# EAGLE board BATT_DISP (EAGLE 9.5.2)
REV: A
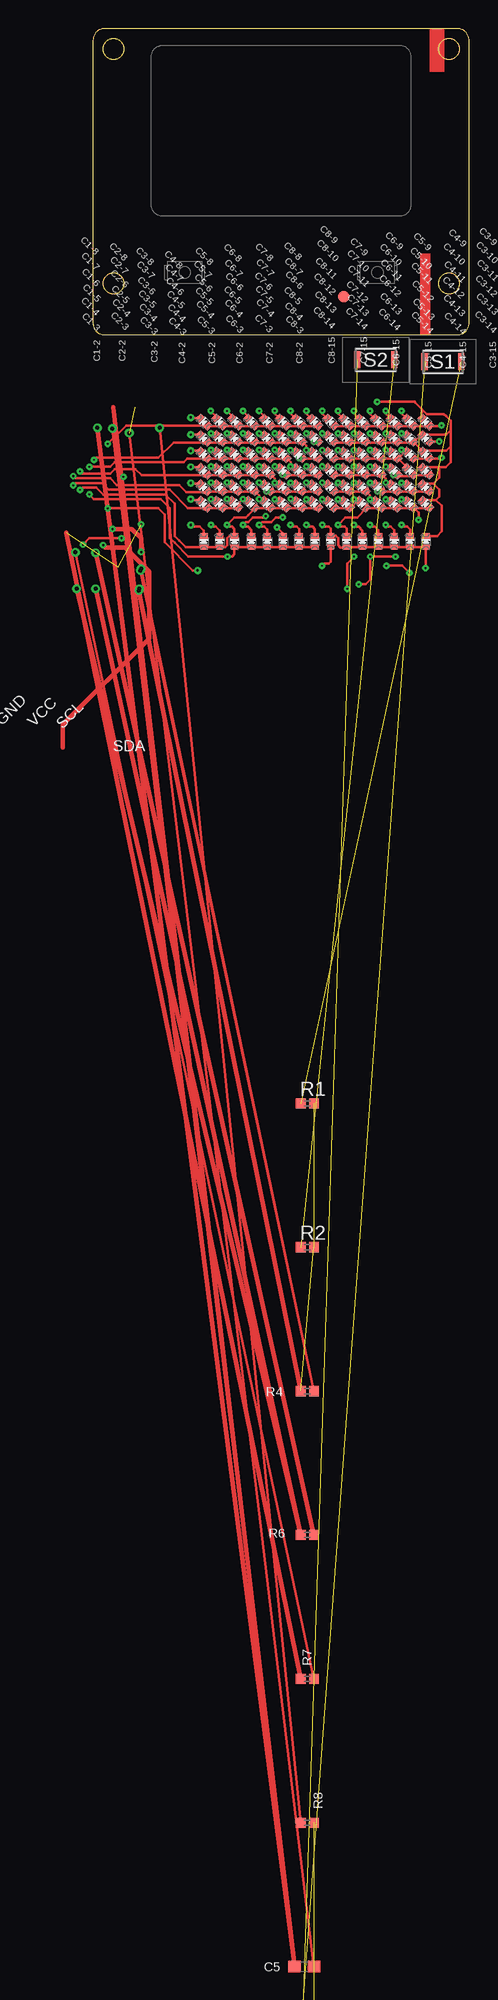
[diagram p0: board, top side]
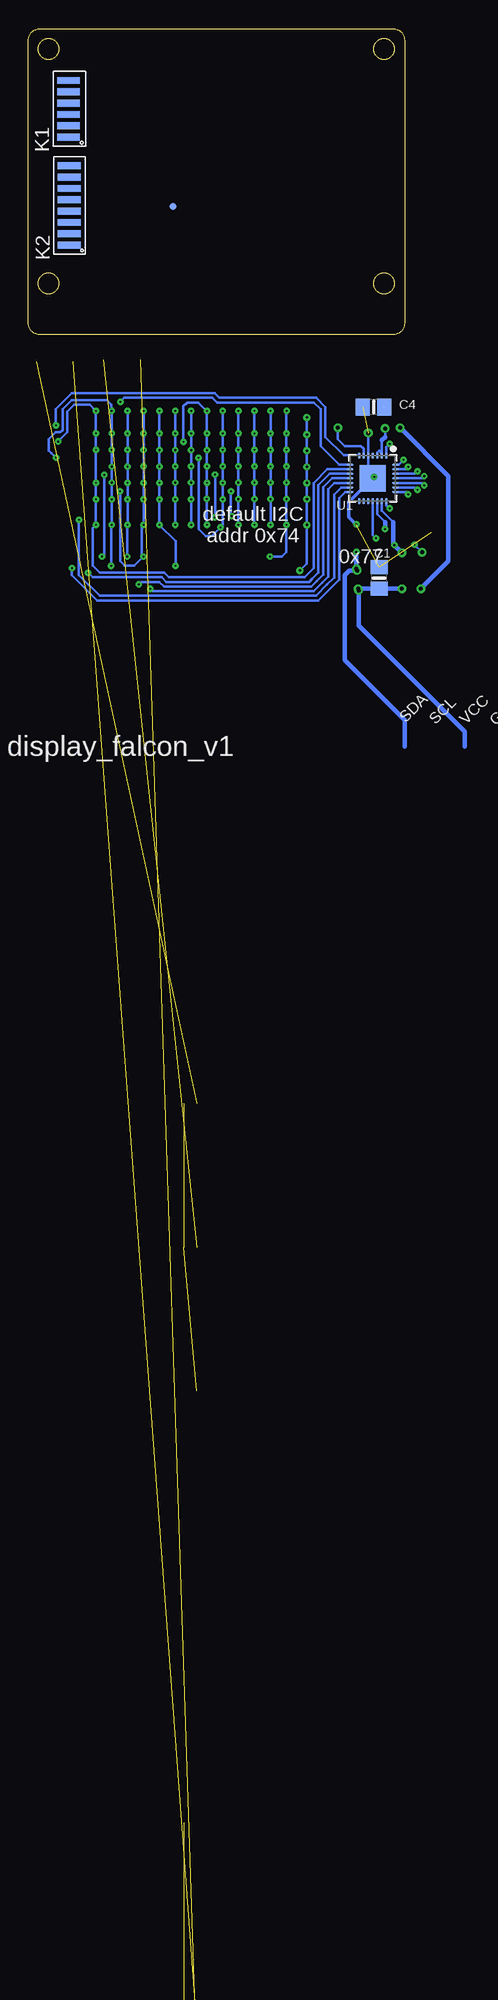
[diagram p1: board, bottom side, seen from below]

Size 33.2 x 27 mm. Coordinates in mm from the lower left corner, seen from the top.
Outline: 0,26 0,1 arc90 1,0 32.2,0 arc90 33.2,1 33.2,26 arc90 32.2,27 1,27 arc90 0,26
Outline: circle at 1.8,25.2 radius 0.9
Outline: circle at 31.4,25.2 radius 0.9
Outline: circle at 31.4,4.5 radius 0.9
Outline: circle at 1.8,4.5 radius 0.9
Copper layers (1*16): Top 0.035mm / dielectric 1.5mm / Bottom 0.035mm
Design rules "adafruit *": minimum track width 7mil, minimum drill 6mil, track to track 6mil, track to pad 6mil, pad to pad 7mil, via to via 6mil, smd to smd 5mil, copper to edge 10mil, drill to drill 8mil, minimum pad ring 10mil, minimum via ring 8mil, stop-mask expansion 2mil, vias tented up to drill 20mil, thermal gap 10mil

## Footprints (pad centres in the part's own frame; a part is rotated, then mirrored left to right if it is on the bottom)
0805-NO = smd 1.24 x 1.5: 1 -0.95,0; 2 0.95,0
CHIPLED_0402_NOOUTLINE = smd 0.65 x 0.45: A 0,-0.5; C 0,0.5
0603 = smd 1.1 x 1: 1 -0.85,0; 2 0.85,0
FIDUCIAL-MICRO = smd 0.635 x 0.635: 1 0,0
FIDUCIAL_1MM = smd 1 x 1: 1 0,0
FLEX6 = smd 0.6 x 2: 1 -2.5,0.25; 2 -1.5,0.25; 3 -0.5,0.25; 4 0.5,0.25; 5 1.5,0.25; 6 2.5,0.25
FLEX8 = smd 0.6 x 2: 1 -3.5,0.25; 2 -2.5,0.25; 3 -1.5,0.25; 4 -0.5,0.25; 5 0.5,0.25; 6 1.5,0.25; 7 2.5,0.25; 8 3.5,0.25
0402 = smd 0.85 x 0.9: 1 -0.58,0; 2 0.58,0
KXT311LHS = smd 0.55 x 1.5: 1 -1.625,0; 2 1.625,0
QFN28_4MM_0.4MM = smd 0.6 x 0.18: 1 -2,1.2; 2 -2,0.8; 3 -2,0.4; 4 -2,0; 5 -2,-0.4; 6 -2,-0.8; 7 -2,-1.2; 15 2,-1.2; 16 2,-0.8; 17 2,-0.4; 18 2,0; 19 2,0.4; 20 2,0.8; 21 2,1.2 | smd 0.18 x 0.6: 8 -1.2,-2; 9 -0.8,-2; 10 -0.4,-2; 11 0,-2; 12 0.4,-2; 13 0.8,-2; 14 1.2,-2; 22 1.2,2; 23 0.8,2; 24 0.4,2; 25 0,2; 26 -0.4,2; 27 -0.8,2; 28 -1.2,2 | smd 2.3 x 2.3: THERMAL 0,0

## Placement (x,y rotation side)
C1  10uF  [0805-NO]  2.24,-21.48 90 bottom  (outside the outline)
C1-2  [CHIPLED_0402_NOOUTLINE]  9.78,-18.26 0 top  (outside the outline)
C1-3  [CHIPLED_0402_NOOUTLINE]  9.78,-14.96 45 top  (outside the outline)
C1-4  [CHIPLED_0402_NOOUTLINE]  9.78,-13.51 45 top  (outside the outline)
C1-5  [CHIPLED_0402_NOOUTLINE]  9.78,-12.06 45 top  (outside the outline)
C1-6  [CHIPLED_0402_NOOUTLINE]  9.78,-10.61 45 top  (outside the outline)
C1-7  [CHIPLED_0402_NOOUTLINE]  9.78,-9.16 45 top  (outside the outline)
C1-8  [CHIPLED_0402_NOOUTLINE]  9.78,-7.71 45 top  (outside the outline)
C2  0.1uF  [0603]  18.64,-156.76 0 top  (outside the outline)
C2-2  [CHIPLED_0402_NOOUTLINE]  11.18,-18.26 0 top  (outside the outline)
C2-3  [CHIPLED_0402_NOOUTLINE]  11.18,-14.96 45 top  (outside the outline)
C2-4  [CHIPLED_0402_NOOUTLINE]  11.18,-13.51 45 top  (outside the outline)
C2-5  [CHIPLED_0402_NOOUTLINE]  11.18,-12.06 45 top  (outside the outline)
C2-6  [CHIPLED_0402_NOOUTLINE]  11.18,-10.61 45 top  (outside the outline)
C2-7  [CHIPLED_0402_NOOUTLINE]  11.18,-9.16 45 top  (outside the outline)
C2-8  [CHIPLED_0402_NOOUTLINE]  11.18,-7.71 45 top  (outside the outline)
C2-9  [CHIPLED_0402_NOOUTLINE]  29.38,-7.71 45 top  (outside the outline)
C2-10  [CHIPLED_0402_NOOUTLINE]  29.38,-9.16 45 top  (outside the outline)
C2-11  [CHIPLED_0402_NOOUTLINE]  29.38,-10.61 45 top  (outside the outline)
C2-12  [CHIPLED_0402_NOOUTLINE]  29.38,-12.06 45 top  (outside the outline)
C2-13  [CHIPLED_0402_NOOUTLINE]  29.38,-13.51 45 top  (outside the outline)
C2-14  [CHIPLED_0402_NOOUTLINE]  29.38,-14.96 45 top  (outside the outline)
C2-15  [CHIPLED_0402_NOOUTLINE]  29.38,-18.26 0 top  (outside the outline)
C3  0.1uF  [0603]  18.64,-169.46 0 top  (outside the outline)
C3-2  [CHIPLED_0402_NOOUTLINE]  12.48,-18.26 0 top  (outside the outline)
C3-3  [CHIPLED_0402_NOOUTLINE]  12.53,-14.96 45 top  (outside the outline)
C3-4  [CHIPLED_0402_NOOUTLINE]  12.53,-13.51 45 top  (outside the outline)
C3-5  [CHIPLED_0402_NOOUTLINE]  12.53,-12.06 45 top  (outside the outline)
C3-6  [CHIPLED_0402_NOOUTLINE]  12.53,-10.61 45 top  (outside the outline)
C3-7  [CHIPLED_0402_NOOUTLINE]  12.53,-9.16 45 top  (outside the outline)
C3-8  [CHIPLED_0402_NOOUTLINE]  12.58,-7.71 45 top  (outside the outline)
C3-9  [CHIPLED_0402_NOOUTLINE]  27.98,-7.71 45 top  (outside the outline)
C3-10  [CHIPLED_0402_NOOUTLINE]  27.98,-9.16 45 top  (outside the outline)
C3-11  [CHIPLED_0402_NOOUTLINE]  27.98,-10.61 45 top  (outside the outline)
C3-12  [CHIPLED_0402_NOOUTLINE]  27.98,-12.06 45 top  (outside the outline)
C3-13  [CHIPLED_0402_NOOUTLINE]  27.98,-13.51 45 top  (outside the outline)
C3-14  [CHIPLED_0402_NOOUTLINE]  27.98,-14.96 45 top  (outside the outline)
C3-15  [CHIPLED_0402_NOOUTLINE]  27.98,-18.26 0 top  (outside the outline)
C4  10uF  [0805-NO]  2.73,-6.39 180 bottom  (outside the outline)
C4-2  [CHIPLED_0402_NOOUTLINE]  13.98,-18.26 0 top  (outside the outline)
C4-3  [CHIPLED_0402_NOOUTLINE]  13.98,-14.96 45 top  (outside the outline)
C4-4  [CHIPLED_0402_NOOUTLINE]  13.98,-13.51 45 top  (outside the outline)
C4-5  [CHIPLED_0402_NOOUTLINE]  13.98,-12.06 45 top  (outside the outline)
C4-6  [CHIPLED_0402_NOOUTLINE]  13.98,-10.61 45 top  (outside the outline)
C4-7  [CHIPLED_0402_NOOUTLINE]  13.98,-9.16 45 top  (outside the outline)
C4-8  [CHIPLED_0402_NOOUTLINE]  13.98,-7.71 45 top  (outside the outline)
C4-9  [CHIPLED_0402_NOOUTLINE]  26.58,-7.71 45 top  (outside the outline)
C4-10  [CHIPLED_0402_NOOUTLINE]  26.58,-9.16 45 top  (outside the outline)
C4-11  [CHIPLED_0402_NOOUTLINE]  26.58,-10.61 45 top  (outside the outline)
C4-12  [CHIPLED_0402_NOOUTLINE]  26.58,-12.06 45 top  (outside the outline)
C4-13  [CHIPLED_0402_NOOUTLINE]  26.58,-13.51 45 top  (outside the outline)
C4-14  [CHIPLED_0402_NOOUTLINE]  26.58,-14.96 45 top  (outside the outline)
C4-15  [CHIPLED_0402_NOOUTLINE]  26.58,-18.26 0 top  (outside the outline)
C5  0.1uF  [0603]  18.64,-144.06 0 top  (outside the outline)
C5-2  [CHIPLED_0402_NOOUTLINE]  15.38,-18.26 0 top  (outside the outline)
C5-3  [CHIPLED_0402_NOOUTLINE]  15.38,-14.96 45 top  (outside the outline)
C5-4  [CHIPLED_0402_NOOUTLINE]  15.38,-13.51 45 top  (outside the outline)
C5-5  [CHIPLED_0402_NOOUTLINE]  15.38,-12.06 45 top  (outside the outline)
C5-6  [CHIPLED_0402_NOOUTLINE]  15.38,-10.61 45 top  (outside the outline)
C5-7  [CHIPLED_0402_NOOUTLINE]  15.38,-9.16 45 top  (outside the outline)
C5-8  [CHIPLED_0402_NOOUTLINE]  15.38,-7.71 45 top  (outside the outline)
C5-9  [CHIPLED_0402_NOOUTLINE]  25.18,-7.71 45 top  (outside the outline)
C5-10  [CHIPLED_0402_NOOUTLINE]  25.18,-9.16 45 top  (outside the outline)
C5-11  [CHIPLED_0402_NOOUTLINE]  25.18,-10.61 45 top  (outside the outline)
C5-12  [CHIPLED_0402_NOOUTLINE]  25.18,-12.06 45 top  (outside the outline)
C5-13  [CHIPLED_0402_NOOUTLINE]  25.18,-13.51 45 top  (outside the outline)
C5-14  [CHIPLED_0402_NOOUTLINE]  25.18,-14.96 45 top  (outside the outline)
C5-15  [CHIPLED_0402_NOOUTLINE]  25.18,-18.26 0 top  (outside the outline)
C6-2  [CHIPLED_0402_NOOUTLINE]  16.78,-18.26 0 top  (outside the outline)
C6-3  [CHIPLED_0402_NOOUTLINE]  16.78,-14.96 45 top  (outside the outline)
C6-4  [CHIPLED_0402_NOOUTLINE]  16.78,-13.51 45 top  (outside the outline)
C6-5  [CHIPLED_0402_NOOUTLINE]  16.78,-12.06 45 top  (outside the outline)
C6-6  [CHIPLED_0402_NOOUTLINE]  16.78,-10.61 45 top  (outside the outline)
C6-7  [CHIPLED_0402_NOOUTLINE]  16.78,-9.16 45 top  (outside the outline)
C6-8  [CHIPLED_0402_NOOUTLINE]  16.78,-7.71 45 top  (outside the outline)
C6-9  [CHIPLED_0402_NOOUTLINE]  23.78,-7.71 45 top  (outside the outline)
C6-10  [CHIPLED_0402_NOOUTLINE]  23.78,-9.16 45 top  (outside the outline)
C6-11  [CHIPLED_0402_NOOUTLINE]  23.78,-10.61 45 top  (outside the outline)
C6-12  [CHIPLED_0402_NOOUTLINE]  23.78,-12.06 45 top  (outside the outline)
C6-13  [CHIPLED_0402_NOOUTLINE]  23.78,-13.51 45 top  (outside the outline)
C6-14  [CHIPLED_0402_NOOUTLINE]  23.78,-14.96 45 top  (outside the outline)
C6-15  [CHIPLED_0402_NOOUTLINE]  23.78,-18.26 0 top  (outside the outline)
C7-2  [CHIPLED_0402_NOOUTLINE]  18.18,-18.26 0 top  (outside the outline)
C7-3  [CHIPLED_0402_NOOUTLINE]  18.18,-14.96 45 top  (outside the outline)
C7-4  [CHIPLED_0402_NOOUTLINE]  18.18,-13.51 45 top  (outside the outline)
C7-5  [CHIPLED_0402_NOOUTLINE]  18.18,-12.06 45 top  (outside the outline)
C7-6  [CHIPLED_0402_NOOUTLINE]  18.18,-10.61 45 top  (outside the outline)
C7-7  [CHIPLED_0402_NOOUTLINE]  18.18,-9.16 45 top  (outside the outline)
C7-8  [CHIPLED_0402_NOOUTLINE]  18.18,-7.71 45 top  (outside the outline)
C7-9  [CHIPLED_0402_NOOUTLINE]  22.38,-7.71 45 top  (outside the outline)
C7-10  [CHIPLED_0402_NOOUTLINE]  22.38,-9.16 45 top  (outside the outline)
C7-11  [CHIPLED_0402_NOOUTLINE]  22.38,-10.61 45 top  (outside the outline)
C7-12  [CHIPLED_0402_NOOUTLINE]  22.38,-12.06 45 top  (outside the outline)
C7-13  [CHIPLED_0402_NOOUTLINE]  22.38,-13.51 45 top  (outside the outline)
C7-14  [CHIPLED_0402_NOOUTLINE]  22.38,-14.96 45 top  (outside the outline)
C7-15  [CHIPLED_0402_NOOUTLINE]  22.38,-18.26 0 top  (outside the outline)
C8-2  [CHIPLED_0402_NOOUTLINE]  19.58,-18.26 0 top  (outside the outline)
C8-3  [CHIPLED_0402_NOOUTLINE]  19.58,-14.96 45 top  (outside the outline)
C8-4  [CHIPLED_0402_NOOUTLINE]  19.58,-13.51 45 top  (outside the outline)
C8-5  [CHIPLED_0402_NOOUTLINE]  19.58,-12.06 45 top  (outside the outline)
C8-6  [CHIPLED_0402_NOOUTLINE]  19.58,-10.61 45 top  (outside the outline)
C8-7  [CHIPLED_0402_NOOUTLINE]  19.58,-9.16 45 top  (outside the outline)
C8-8  [CHIPLED_0402_NOOUTLINE]  19.58,-7.71 45 top  (outside the outline)
C8-9  [CHIPLED_0402_NOOUTLINE]  20.98,-7.71 45 top  (outside the outline)
C8-10  [CHIPLED_0402_NOOUTLINE]  20.98,-9.16 45 top  (outside the outline)
C8-11  [CHIPLED_0402_NOOUTLINE]  20.98,-10.61 45 top  (outside the outline)
C8-12  [CHIPLED_0402_NOOUTLINE]  20.98,-12.06 45 top  (outside the outline)
C8-13  [CHIPLED_0402_NOOUTLINE]  20.98,-13.51 45 top  (outside the outline)
C8-14  [CHIPLED_0402_NOOUTLINE]  20.98,-14.96 45 top  (outside the outline)
C8-15  [CHIPLED_0402_NOOUTLINE]  20.98,-18.26 0 top  (outside the outline)
FD1  FIDUCIALUFIDUCIAL  [FIDUCIAL-MICRO]  20.44,11.33 0 bottom
FD3  FIDUCIAL""  [FIDUCIAL_1MM]  22.11,3.35 0 top
K1  FLEX6  [FLEX6]  29.4,19.94 90 bottom
K2  FLEX_DCDC  [FLEX8]  29.34,11.4 90 bottom
R1  10k  [0402]  18.91,-67.86 0 top  (outside the outline)
R2  10k  [0402]  18.91,-80.56 0 top  (outside the outline)
R4  10k  [0402]  18.91,-93.26 180 top  (outside the outline)
R6  10k  [0402]  18.91,-105.96 180 top  (outside the outline)
R7  10k  [0402]  18.91,-118.66 180 top  (outside the outline)
R8  10k  [0402]  18.91,-131.36 180 top  (outside the outline)
S1  KXT311LHS  [KXT311LHS]  30.88,-2.39 0 top
S2  KXT311LHS  [KXT311LHS]  24.95,-2.23 0 top
U1  IS31FL3731-SALS2  [QFN28_4MM_0.4MM]  2.8,-12.69 270 bottom  (outside the outline)

## Library data of the parts
C1 C1-2-C1-8 C2-2-C2-15 C3-2-C3-15 C4 C4-2-C4-15 C5-2-C5-15 C6-2-C6-15 C7-2-C7-15 C8-2-C8-15 U1 = microbuilder
C2 C3 C5 = SparkFun-Capacitors; PROD_ID: CAP-08604
FD1 = SparkFun-Aesthetics
FD3 = microbuilder; BOM: EXCLUDE
K1 K2 = Flex_Faja_connector
R1 R2 R4 R6-R8 = SparkFun-Resistors
S1 S2 = switch momentary CK KXT311LHS; DESCRIPTION: Tactile Switches 20mA 15VDC 100gf 0.6mm SPST NO SMT; HEIGHT: 0.7mm; MANUFACTURER_NAME: C & K COMPONENTS; MANUFACTURER_PART_NUMBER: KXT311LHS; MOUSER_PART_NUMBER: 611-KXT311LHS; MOUSER_PRICE-STOCK: https://www.mouser.co.uk/ProductDetail/CK/KXT311LHS/?qs=%2FQ2qp2Z%2FWFxZqSWVDr5IpA%3D%3D

## Nets
GND: C1.2 C2.2 C3.2 C4.2 C5.2 R7.2 R8.1 U1.5 U1.THERMAL
M_ADDR: R7.1 U1.18
M_CA1: C1-2.C C1-3.C C1-4.C C1-5.C C1-6.C C1-7.C C1-8.C U1.21
M_CA2: C2-2.C C2-3.C C2-4.C C2-5.C C2-6.C C2-7.C C2-8.C C3-2.A C4-2.A C5-2.A C6-2.A C7-2.A C8-2.A U1.22
M_CA3: C1-2.A C2-2.A C3-2.C C3-3.C C3-4.C C3-5.C C3-6.C C3-7.C C3-8.C C4-3.A C5-3.A C6-3.A C7-3.A C8-3.A U1.23
M_CA4: C1-3.A C2-3.A C3-3.A C4-2.C C4-3.C C4-4.C C4-5.C C4-6.C C4-7.C C4-8.C C5-4.A C6-4.A C7-4.A C8-4.A U1.24
M_CA5: C1-4.A C2-4.A C3-4.A C4-4.A C5-2.C C5-3.C C5-4.C C5-5.C C5-6.C C5-7.C C5-8.C C6-5.A C7-5.A C8-5.A U1.25
M_CA6: C1-5.A C2-5.A C3-5.A C4-5.A C5-5.A C6-2.C C6-3.C C6-4.C C6-5.C C6-6.C C6-7.C C6-8.C C7-6.A C8-6.A U1.26
M_CA7: C1-6.A C2-6.A C3-6.A C4-6.A C5-6.A C6-6.A C7-2.C C7-3.C C7-4.C C7-5.C C7-6.C C7-7.C C7-8.C C8-7.A U1.27
M_CA8: C1-7.A C2-7.A C3-7.A C4-7.A C5-7.A C6-7.A C7-7.A C8-2.C C8-3.C C8-4.C C8-5.C C8-6.C C8-7.C C8-8.C U1.28
M_CA9: C1-8.A C2-8.A C3-8.A C4-8.A C5-8.A C6-8.A C7-8.A C8-8.A U1.1
M_CB1: C2-9.A C3-9.A C4-9.A C5-9.A C6-9.A C7-9.A C8-9.A U1.7
M_CB2: C2-9.C C2-10.C C2-11.C C2-12.C C2-13.C C2-14.C C2-15.C C3-10.A C4-10.A C5-10.A C6-10.A C7-10.A C8-10.A U1.8
M_CB3: C2-10.A C3-9.C C3-10.C C3-11.C C3-12.C C3-13.C C3-14.C C3-15.C C4-11.A C5-11.A C6-11.A C7-11.A C8-11.A U1.9
M_CB4: C2-11.A C3-11.A C4-9.C C4-10.C C4-11.C C4-12.C C4-13.C C4-14.C C4-15.C C5-12.A C6-12.A C7-12.A C8-12.A U1.10
M_CB5: C2-12.A C3-12.A C4-12.A C5-9.C C5-10.C C5-11.C C5-12.C C5-13.C C5-14.C C5-15.C C6-13.A C7-13.A C8-13.A U1.11
M_CB6: C2-13.A C3-13.A C4-13.A C5-13.A C6-9.C C6-10.C C6-11.C C6-12.C C6-13.C C6-14.C C6-15.C C7-14.A C8-14.A U1.12
M_CB7: C2-14.A C3-14.A C4-14.A C5-14.A C6-14.A C7-9.C C7-10.C C7-11.C C7-12.C C7-13.C C7-14.C C7-15.C C8-15.A U1.13
M_CB8: C2-15.A C3-15.A C4-15.A C5-15.A C6-15.A C7-15.A C8-9.C C8-10.C C8-11.C C8-12.C C8-13.C C8-14.C C8-15.C U1.14
M_INTB: U1.4
M_SCL: R6.1 U1.20
M_SDA: R4.1 U1.19
N$1: K1.1
N$2: K1.2
N$3: K1.3
N$4: K1.4
N$5: K1.5
N$6: K1.6
N$8: C2.1 S1.1
N$10: C3.1 S2.1
R_EXT: R8.2 U1.6
S_DOWN: R2.1 S2.2
S_UP: R1.1 S1.2
VCC: C1.1 C4.1 C5.1 R1.2 R2.2 R4.2 R6.2 U1.2 U1.3

## Tracks (layer width: path | path; a pad name or v marks a point on that pad's centre or on a via)
GND  (via drill 0.15, 0.35)  (6 unrouted)
  Top 0.203: v3.2,-8.69 C5.2
  Top 0.406: -2.34,-17.49 R7.2
  Bottom 0.203: 2.54,-12.41 v2.68,-12.56 | U1.THERMAL 3.2,-12.29 U1.5 v3.2,-8.69
  Bottom 0.305: v4.25,-16.75 4.91,-16.09 4.91,-14.74 4.89,-14.74 2.83,-12.69
  Bottom 0.406: v2.68,-12.56 U1.THERMAL 2.83,-12.69
M_ADDR  (via drill 0.15, 0.35)
  Top 0.203: v2.52,-17.97 -0.32,-17.97 v-0.88,-18.53 | R7.1 v-1.55,-19.2
  Bottom 0.203: U1.18 2.8,-17.69 v2.52,-17.97 | v-0.88,-18.53 v-1.55,-19.2
M_CA1  (via drill 0.15, 0.2)
  Top 0.203: v9.23,-20.82 8.82,-20.82 6.33,-18.33 6.33,-16.45 6.33,-15.89 5.77,-15.33 v1.3,-15.33 | 8.68,-13.16 v8.62,-13.09 8.68,-13.16 | C1-2.C 9.78,-17.3 9.43,-16.95 8.77,-16.95 v8.62,-16.8 | C1-8.C 8.66,-7.36 v8.62,-7.31 | C1-7.C 8.64,-8.81 v8.62,-8.83 | C1-6.C v8.63,-10.26 v8.62,-10.25 | C1-3.C 8.71,-14.61 v8.62,-14.52 | C1-4.C 8.68,-13.16 | C1-5.C 8.66,-11.71 v8.62,-11.67
  Bottom 0.203: v8.62,-7.31 v8.62,-8.83 8.62,-10.05 v8.62,-10.25 v8.62,-11.67 v8.62,-13.09 v8.62,-14.52 v8.62,-16.8 8.62,-20.21 v9.23,-20.82 | U1.21 1.6,-15.03 v1.3,-15.33
M_CA2  (via drill 0.15)
  Top 0.203: C8-2.A C7-2.A C6-2.A C5-2.A C4-2.A C3-2.A 12.48,-19.39 12.28,-19.6 v11.87,-19.6 8.42,-19.6 7.2,-18.38 6.79,-17.97 6.79,-16.14 6.79,-15.33 5.98,-14.52 0.08,-14.52 v-0.32,-14.11 | C2-2.C 11.18,-17.28 10.85,-16.95 10.58,-16.95 v10.42,-16.8 | C2-8.C 10.83,-7.17 v10.4,-6.74 | C2-7.C 10.51,-8.81 v10.42,-8.72 | C2-3.C 10.51,-14.61 v10.42,-14.52 | C2-4.C 10.51,-13.16 v10.42,-13.07 | C2-5.C 10.51,-11.71 v10.42,-11.62 | C2-6.C 10.51,-10.26 v10.42,-10.17
  Bottom 0.203: v10.4,-6.74 10.42,-6.77 v10.42,-8.72 v10.42,-10.17 v10.42,-11.62 v10.42,-13.07 v10.42,-14.52 v10.42,-16.8 10.45,-16.83 10.45,-18.78 10.45,-19.19 10.85,-19.6 v11.87,-19.6 | U1.22 -0.1,-13.89 v-0.32,-14.11
M_CA3  (via drill 0.15)
  Top 0.203: C8-3.A C7-3.A C6-3.A C5-3.A C4-3.A 13.7,-15.94 13.5,-16.14 12.48,-16.14 v11.82,-16.8 11.97,-16.95 12.28,-16.95 12.48,-17.16 C3-2.C 12.08,-17.76 11.87,-17.97 11.87,-18.58 11.69,-18.76 C2-2.A C1-2.A 8.19,-18.76 7.6,-18.17 7.2,-17.77 7.2,-15.63 7.2,-14.92 6.38,-14.11 0.91,-14.11 0.29,-13.49 -0.92,-13.49 v-1.13,-13.7 | C3-8.C 12.23,-7.15 v11.82,-6.74 | C3-7.C 11.9,-8.81 v11.82,-8.72 | C3-4.C 11.91,-13.16 v11.82,-13.07 | C3-5.C 11.91,-11.71 v11.82,-11.62 | C3-6.C 11.9,-10.26 v11.82,-10.17 | C3-3.C 11.91,-14.61 v11.82,-14.52
  Bottom 0.203: v11.82,-16.8 v11.82,-14.52 v11.82,-13.07 v11.82,-11.62 v11.82,-10.17 v11.82,-8.72 v11.82,-6.74 | U1.23 -0.92,-13.49 v-1.13,-13.7
M_CA4  (via drill 0.15)
  Top 0.203: C8-4.A C7-4.A C6-4.A C5-4.A 15.36,-13.86 | C4-2.C 13.98,-17.24 13.7,-16.95 13.39,-16.95 v13.24,-16.8 13.5,-16.55 13.7,-16.55 14.11,-16.14 15.12,-16.14 v15.25,-16.01 | 15.36,-13.86 v15.32,-13.83 15.36,-13.86 | v-1.74,-13.3 -1.53,-13.09 U1.24 1.41,-13.7 6.76,-13.7 8.38,-15.31 8.61,-15.31 | C4-8.C 13.63,-7.13 v13.24,-6.74 | C4-7.C 13.32,-8.81 v13.24,-8.72 | C4-3.C 13.54,-14.52 v13.24,-14.52 12.89,-14.87 C3-3.A C2-3.A C1-3.A 8.61,-15.31 | 8.61,-15.31 | C4-6.C 13.33,-10.26 v13.24,-10.17 | C4-5.C 13.33,-11.71 v13.24,-11.62 | C4-4.C 13.33,-13.16 v13.24,-13.07
  Bottom 0.203: v13.24,-16.8 v13.24,-14.52 v13.24,-13.07 v13.24,-11.62 v13.24,-10.17 v13.24,-8.72 v13.24,-6.74 | v15.32,-13.83 15.32,-15.94 v15.25,-16.01 | U1.24 -1.53,-13.09 v-1.74,-13.3
M_CA5  (via drill 0.15)
  Top 0.203: C8-5.A C7-5.A C6-5.A 16.78,-12.41 v16.72,-12.36 | C5-2.C 15.38,-17.21 15.12,-16.95 14.82,-16.95 v14.66,-16.8 14.92,-16.55 15.73,-16.55 16.14,-16.14 v16.75,-16.14 | v-1.74,-12.48 -1.54,-12.69 1.51,-12.69 2.12,-13.3 7.53,-13.3 7.6,-13.3 8.21,-13.91 10.09,-13.91 C1-4.A C2-4.A C3-4.A C4-4.A 14.66,-14.19 v14.66,-14.52 14.76,-14.61 C5-3.C | C5-8.C 15.03,-7.11 v14.66,-6.74 | C5-7.C 14.75,-8.81 v14.66,-8.72 | C5-4.C 14.75,-13.16 v14.66,-13.07 | v14.66,-11.62 14.94,-11.62 C5-5.C | C5-6.C 14.75,-10.26 v14.66,-10.17
  Bottom 0.203: v14.66,-16.8 v14.66,-14.52 v14.66,-13.07 v14.66,-11.62 v14.66,-10.17 v14.66,-8.72 v14.66,-6.74 | v16.72,-12.36 16.72,-16.12 v16.75,-16.14 | U1.25 -1.54,-12.69 v-1.74,-12.48
M_CA6  (via drill 0.15)
  Top 0.203: C8-6.A C7-6.A 18.25,-10.96 v18.17,-10.88 | v16.04,-13.09 16.57,-13.09 | 16.34,-11.62 v16.04,-11.62 16.12,-11.71 C6-5.C | 16.34,-10.17 v16.04,-10.17 16.12,-10.26 C6-6.C | 16.35,-8.72 v16.04,-8.72 16.12,-8.81 C6-7.C | v16.04,-6.74 16.04,-6.97 | C6-2.C 16.78,-17.55 v16.24,-17.01 | 16.36,-14.54 v16.04,-14.54 16.1,-14.61 C6-3.C | 4.28,-12.41 3.74,-11.87 1.91,-11.87 1.51,-12.28 -0.93,-12.28 v-1.13,-12.08 | v16.04,-13.09 16.04,-12.72 C5-5.A C4-5.A C3-5.A C2-5.A C1-5.A 4.28,-12.41 | 16.04,-6.97 | 16.04,-6.97 C6-8.C | C6-4.C 16.1,-13.16 v16.04,-13.09 | 4.28,-12.41
  Bottom 0.203: v16.04,-6.74 v16.04,-8.72 v16.04,-10.17 v16.04,-11.62 v16.04,-13.09 v16.04,-14.54 16.04,-16.8 v16.24,-17.01 17,-17.77 17.56,-17.77 18.17,-17.16 v18.17,-10.88 | U1.26 -0.92,-12.29 v-1.13,-12.08
M_CA7  (via drill 0.15)
  Top 0.203: C7-2.C 18.18,-17.17 17.97,-16.95 17.59,-16.95 v17.43,-16.8 | v17.43,-6.74 17.43,-6.96 | 17.71,-14.49 v17.46,-14.49 17.58,-14.61 C7-3.C | 17.76,-13.09 v17.43,-13.09 17.5,-13.16 C7-4.C | v17.43,-11.62 17.74,-11.62 | v17.43,-11.62 17.43,-11.26 | 17.77,-10.2 v17.43,-10.2 17.49,-10.26 C7-6.C | 17.75,-8.72 v17.43,-8.72 17.52,-8.81 C7-7.C | v-0.32,-11.67 1.3,-11.67 1.51,-11.67 1.91,-11.26 8.01,-11.26 8.31,-10.96 | C8-7.A 19.57,-9.51 v19.52,-9.46 | 8.31,-10.96 C1-6.A C2-6.A C3-6.A C4-6.A C5-6.A C6-6.A 17.43,-11.26 | 8.31,-10.96 | 17.43,-6.96 | 17.43,-6.96 C7-8.C | 17.43,-11.26 | C7-5.C 17.52,-11.71 v17.43,-11.62
  Bottom 0.203: v17.43,-16.8 17.46,-16.78 v17.46,-14.49 17.43,-14.47 v17.43,-13.09 v17.43,-11.62 v17.43,-10.2 v17.43,-8.72 v17.43,-6.74 18.2,-5.98 19.19,-5.98 19.52,-6.31 v19.52,-9.46 | U1.27 -0.11,-11.89 v-0.32,-11.67
M_CA8  (via drill 0.15)
  Top 0.203: C8-2.C 19.58,-17.15 19.39,-16.95 18.98,-16.95 v18.83,-16.8 | v18.83,-10.2 19.17,-10.2 | 19.15,-8.72 v18.83,-8.72 18.91,-8.81 C8-7.C | 19.16,-14.54 v18.83,-14.54 18.9,-14.61 C8-3.C | v18.83,-6.74 18.83,-6.96 | v18.83,-10.2 18.83,-9.81 | 19.14,-13.07 v18.83,-13.07 18.92,-13.16 C8-4.C | 19.14,-11.62 v18.83,-11.62 18.92,-11.71 C8-5.C | 7.12,-9.51 5.77,-10.86 0.29,-10.86 v0.08,-11.06 | 7.12,-9.51 C1-7.A C2-7.A C3-7.A C4-7.A C5-7.A C6-7.A C7-7.A 18.83,-9.81 | 7.12,-9.51 | 18.83,-6.96 | 18.83,-6.96 C8-8.C | C8-6.C 18.89,-10.26 v18.83,-10.2 | 18.83,-9.81
  Bottom 0.203: v18.83,-6.74 v18.83,-8.72 v18.83,-10.2 v18.83,-11.62 v18.83,-13.07 v18.83,-14.54 v18.83,-16.8 | U1.28 0.51,-11.49 v0.08,-11.06
M_CA9  (via drill 0.15)
  Top 0.203: C8-8.A C7-8.A C6-8.A C5-8.A C4-8.A C3-8.A C2-8.A C1-8.A 10.08,-8.01 7.81,-8.01 2.93,-8.01 v1.3,-9.64
  Bottom 0.203: U1.1 1.6,-9.94 v1.3,-9.64
M_CB1  (via drill 0.15)
  Top 0.203: C8-9.A C7-9.A C6-9.A C5-9.A C4-9.A C3-9.A C2-9.A 30.72,-8.06 | 30.72,-8.06 v30.77,-8.01 30.72,-8.06
  Bottom 0.203: v30.77,-8.01 30.77,-6.59 29.35,-5.17 16.75,-5.17 16.34,-5.58 7.81,-5.58 6.99,-6.39 6.99,-9.03 5.37,-10.66 4.03,-10.66 U1.7
M_CB2  (via drill 0.15)
  Top 0.203: C3-10.A C4-10.A C5-10.A C6-10.A C7-10.A C8-10.A | C3-10.A 28.34,-9.63 28.33,-9.64 28.33,-9.51 C2-10.C 31.19,-8.81 31.58,-8.42 | C3-10.A 29.03,-10.21 C2-11.C 31.17,-10.26 31.58,-9.84 | 30.27,-14.61 30.56,-14.31 30.56,-13.7 30.02,-13.16 | 30.02,-13.16 30.56,-12.61 30.56,-12.08 30.56,-11.91 30.36,-11.71 | 31.58,-8.42 31.58,-7.61 31.17,-7.2 30.97,-7 29.45,-7 29.03,-6.58 | C2-15.C 29.54,-17.76 29.55,-17.77 30.36,-17.77 30.77,-17.36 30.77,-15.11 30.27,-14.61 | 31.58,-9.84 31.58,-8.42 | 31.14,-11.71 31.58,-11.26 31.58,-9.84 | C2-12.C 30.36,-11.71 | 30.36,-11.71 31.14,-11.71 | 31.14,-11.71 | C2-13.C 30.02,-13.16 | 30.02,-13.16 | C2-14.C 30.27,-14.61 | 30.27,-14.61 | v25.08,-5.93 27.6,-5.93 28.38,-5.93 28.43,-5.98 29.03,-6.58 | C2-9.C 29.03,-6.58
  Bottom 0.203: v25.08,-5.93 24.72,-5.58 16.95,-5.58 16.54,-5.98 8.01,-5.98 7.4,-6.59 7.4,-9.84 5.76,-11.49 U1.8
M_CB3  (via drill 0.15)
  Top 0.203: C4-11.A C5-11.A C6-11.A C7-11.A C8-11.A | C3-15.C 27.98,-17.22 27.72,-16.95 27.39,-16.95 v27.24,-16.8 | C3-12.C 27.63,-11.66 C4-11.A | C4-11.A 26.94,-10.95 C3-11.C 27.54,-10.17 v27.24,-10.17 | v27.24,-6.74 27.24,-6.97 C3-9.C | v27.24,-8.72 27.55,-8.72 C3-10.C | v27.24,-13.09 27.56,-13.09 C3-13.C | v27.24,-14.54 27.56,-14.54 C3-14.C | C2-10.A 29.74,-9.45 29.75,-9.44 v30.56,-9.44
  Bottom 0.203: v30.56,-9.44 30.56,-9.42 29.75,-8.61 29.75,-6.79 29.14,-6.18 27.8,-6.18 v27.24,-6.74 v27.24,-8.72 v27.24,-10.17 v27.24,-13.09 v27.24,-14.54 v27.24,-16.8 27.52,-17.08 27.52,-20.41 26.91,-21.02 21.22,-21.02 20.81,-21.42 8.82,-21.42 8.01,-20.61 8.01,-13.09 6.8,-11.89 U1.9
M_CB4  (via drill 0.15)
  Top 0.203: C8-12.A C7-12.A C6-12.A C5-12.A 25.84,-12.72 v25.84,-13.07 26.14,-13.07 C4-13.C | v25.89,-20.41 27.31,-20.41 v27.92,-21.02 | C4-15.C 26.58,-17.24 26.3,-16.95 25.99,-16.95 v25.84,-16.8 | v25.84,-14.54 26.16,-14.54 C4-14.C | v25.84,-6.74 25.84,-6.97 C4-9.C | v25.84,-8.72 26.15,-8.72 C4-10.C | v25.84,-10.17 26.14,-10.17 C4-11.C | v25.84,-11.65 26.17,-11.65 C4-12.C | C3-11.A C2-11.A 30.66,-10.96 | 30.66,-10.96 v30.77,-10.86 30.66,-10.96
  Bottom 0.203: v27.92,-21.02 27.52,-21.42 21.42,-21.42 21.01,-21.83 8.42,-21.83 8.14,-21.55 7.6,-21.02 7.6,-20.69 7.6,-20.66 7.6,-13.3 6.59,-12.29 6.58,-12.29 U1.10 | v25.89,-20.41 25.89,-16.85 v25.84,-16.8 v25.84,-14.54 v25.84,-13.07 v25.84,-11.65 v25.84,-10.17 v25.84,-8.72 v25.84,-6.74 25.89,-6.69 25.89,-6.18 26.3,-5.78 29.35,-5.78 30.16,-6.59 30.16,-8.42 30.36,-8.62 30.77,-8.62 31.38,-9.23 31.38,-10.25 31.17,-10.45 v30.77,-10.86
M_CB5  (via drill 0.15)
  Top 0.203: C2-12.A C3-12.A 28.34,-12.48 28.33,-12.48 27,-12.48 C4-12.A 26.53,-12.41 v26.5,-12.38 | C8-13.A C7-13.A C6-13.A 24.44,-14.17 v24.44,-14.54 24.76,-14.54 C5-14.C | v23.45,-22.03 24.06,-22.03 24.47,-21.63 v24.47,-19.6 v26.7,-19.6 | C5-15.C 25.18,-17.26 24.88,-16.95 24.6,-16.95 v24.44,-16.8 | v24.44,-13.09 24.76,-13.09 C5-13.C | v24.44,-11.65 24.77,-11.65 C5-12.C | v24.44,-6.74 24.44,-6.97 C5-9.C | v24.44,-8.72 24.75,-8.72 C5-10.C | v24.44,-10.17 24.74,-10.17 C5-11.C
  Bottom 0.203: 7.17,-20.84 7.17,-20.87 | v23.45,-22.03 23.25,-21.83 21.62,-21.83 21.22,-22.24 8.21,-22.24 7.73,-21.75 7.17,-21.2 7.17,-20.84 | v24.44,-6.74 v24.44,-8.72 v24.44,-10.17 v24.44,-11.65 v24.44,-13.09 v24.44,-14.54 v24.44,-16.8 24.47,-16.83 v24.47,-19.6 | v26.5,-12.38 26.5,-19.39 v26.7,-19.6 | 7.17,-20.84 7.17,-13.47 6.38,-12.69 U1.11
M_CB6  (via drill 0.15)
  Top 0.203: C2-13.A C3-13.A C4-13.A C5-13.A 25.14,-13.86 v25.1,-13.83 | C8-14.A C7-14.A 22.74,-15.3 C6-14.C 23.36,-14.54 v23.02,-14.54 | v22.44,-22.44 22.44,-20.21 v23.05,-19.6 | C6-15.C 23.78,-17.28 23.45,-16.95 23.17,-16.95 v23.02,-16.8 | v23.02,-8.72 23.35,-8.72 C6-10.C | v23.02,-11.62 23.34,-11.62 C6-12.C | v23.02,-6.74 23.02,-6.95 C6-9.C | v23.02,-10.2 23.37,-10.2 C6-11.C | v23.02,-13.09 23.36,-13.09 C6-13.C
  Bottom 0.203: v22.44,-22.44 22.23,-22.64 8.01,-22.64 7.27,-21.91 6.71,-21.35 6.71,-21.04 6.71,-20.99 6.71,-18.3 6.71,-13.63 6.18,-13.09 6.17,-13.09 U1.12 | v23.02,-6.74 v23.02,-8.72 v23.02,-10.2 v23.02,-11.62 v23.02,-13.09 v23.02,-14.54 v23.02,-16.8 23.17,-16.95 23.17,-19.47 v23.05,-19.6 23.86,-20.41 24.67,-20.41 25.1,-19.98 v25.1,-13.83
M_CB7  (via drill 0.15)
  Top 0.203: C3-14.A C4-14.A C5-14.A C6-14.A 23.31,-16.14 23.25,-16.14 22.28,-16.14 v21.62,-16.8 21.78,-16.95 22.23,-16.95 22.38,-17.1 C7-15.C | C8-15.A 20.98,-20.04 20.81,-20.21 20.4,-20.21 v20.2,-20.41 | C3-14.A C2-14.A | v21.62,-14.54 21.96,-14.54 C7-14.C | v21.62,-6.74 21.62,-6.95 C7-9.C | v21.62,-10.2 21.97,-10.2 C7-11.C | v21.62,-8.72 21.95,-8.72 C7-10.C | v28.74,-16.34 28.74,-15.72 C3-14.A | v21.62,-13.09 21.96,-13.09 C7-13.C | v21.62,-11.65 21.97,-11.65 C7-12.C
  Bottom 0.203: v21.62,-6.74 v21.62,-8.72 v21.62,-10.2 v21.62,-11.65 v21.62,-13.09 v21.62,-14.54 v21.62,-16.8 20.2,-18.22 v20.2,-20.41 | v28.74,-16.34 28.74,-19.19 28.74,-21.22 26.91,-23.05 7.81,-23.05 6.84,-22.09 6.21,-21.45 6.21,-21.12 6.21,-15.2 6.21,-14.13 5.57,-13.5 5.56,-13.49 U1.13
M_CB8  (via drill 0.15)
  Top 0.203: v20.23,-16.8 20.38,-16.95 20.81,-16.95 20.98,-17.12 C8-15.C 21.41,-17.76 21.62,-17.97 21.62,-18.58 21.83,-18.78 22.36,-18.78 C7-15.A C6-15.A C5-15.A C4-15.A C3-15.A C2-15.A 29.38,-20.58 v29.35,-20.61 | v20.23,-14.54 20.56,-14.54 C8-14.C | v20.23,-6.74 20.23,-6.96 C8-9.C | v20.23,-8.72 20.55,-8.72 C8-10.C | v20.23,-10.2 20.57,-10.2 C8-11.C | v20.23,-13.07 20.54,-13.07 C8-13.C | v20.23,-11.62 20.54,-11.62 C8-12.C
  Bottom 0.203: v29.35,-20.61 29.35,-21.22 27.11,-23.46 7.6,-23.46 5.77,-21.63 5.77,-14.43 5.23,-13.89 U1.14 | v20.23,-16.8 v20.23,-14.54 v20.23,-13.07 v20.23,-11.62 v20.23,-10.2 v20.23,-8.72 v20.23,-6.74
M_SCL  (via drill 0.15, 0.35)
  Top 0.406: -2.66,-36.45 -2.66,-34.43 4.96,-26.81 4.96,-20.92 2.83,-18.78 1.1,-18.78 v0.9,-18.58 | R6.1 v0.23,-19.25
  Bottom 0.203: U1.20 2,-15.54 1,-16.55 | 1,-18.48 v0.9,-18.58
  Bottom 0.406: 1,-16.55 1,-18.48 | v0.23,-19.25 v0.9,-18.58
M_SDA  (via drill 0.15, 0.35)
  Top 0.203: v4.19,-20.82 R4.1 v4.25,-20.67
  Top 0.406: v1.71,-17.16 3.44,-17.16 4.25,-17.97 v4.25,-19.19
  Bottom 0.203: U1.19 2.4,-15.86 1.71,-16.55
  Bottom 0.406: 1.71,-16.55 v1.71,-17.16 | -0.02,-36.35 -0.02,-34.02 5.26,-28.75 5.26,-21.21 4.86,-20.82 v4.19,-20.82 | v4.25,-19.19 v4.25,-20.67
N$8  (1 unrouted)
N$10  (1 unrouted)
R_EXT  (via drill 0.35)
  Top 0.203: v5.88,-8.23 R8.2
  Bottom 0.203: U1.6 3.6,-10.08 3.84,-9.84 5.27,-9.84 5.88,-9.23 v5.88,-8.23
S_DOWN  (1 unrouted)
S_UP  (1 unrouted)
VCC  (via drill 0.35)  (3 unrouted)
  Top 0.203: v1.71,-8.28 C5.1 | v4.1,-22.43 R4.2
  Top 0.406: C4.1 C5.1 v0.39,-8.22 | v4.05,-22.58 R4.2 | v-1.44,-22.44 R6.2 v0.24,-22.43
  Bottom 0.203: U1.3 2.4,-10.41 2.24,-10.25 2,-10.48 U1.2 2,-9.32 | 1.71,-9.03 v1.71,-8.28 | C1.1
  Bottom 0.406: -5.3,-36.36 -5.3,-35.04 4.05,-25.69 v4.05,-22.58 | 2,-9.32 1.71,-9.03 | v4.1,-22.43 C1.1 v0.24,-22.43 | v-1.44,-22.44 -3.88,-20 -3.88,-12.48 v0.39,-8.22
(copper drawn outside any net)
  shapes: Top area x2

## Text on the board
bPlace: default I2C / addr 0x74 | 0x77
tNames: SCL | GND | VCC | SDA
bNames: SLFPO | SCL | SDA | GND | VCC | display_falcon_v1